# EAGLE board 0869924b8491299c740fd2650cca9fc03f659eed (EAGLE 6.6.0)
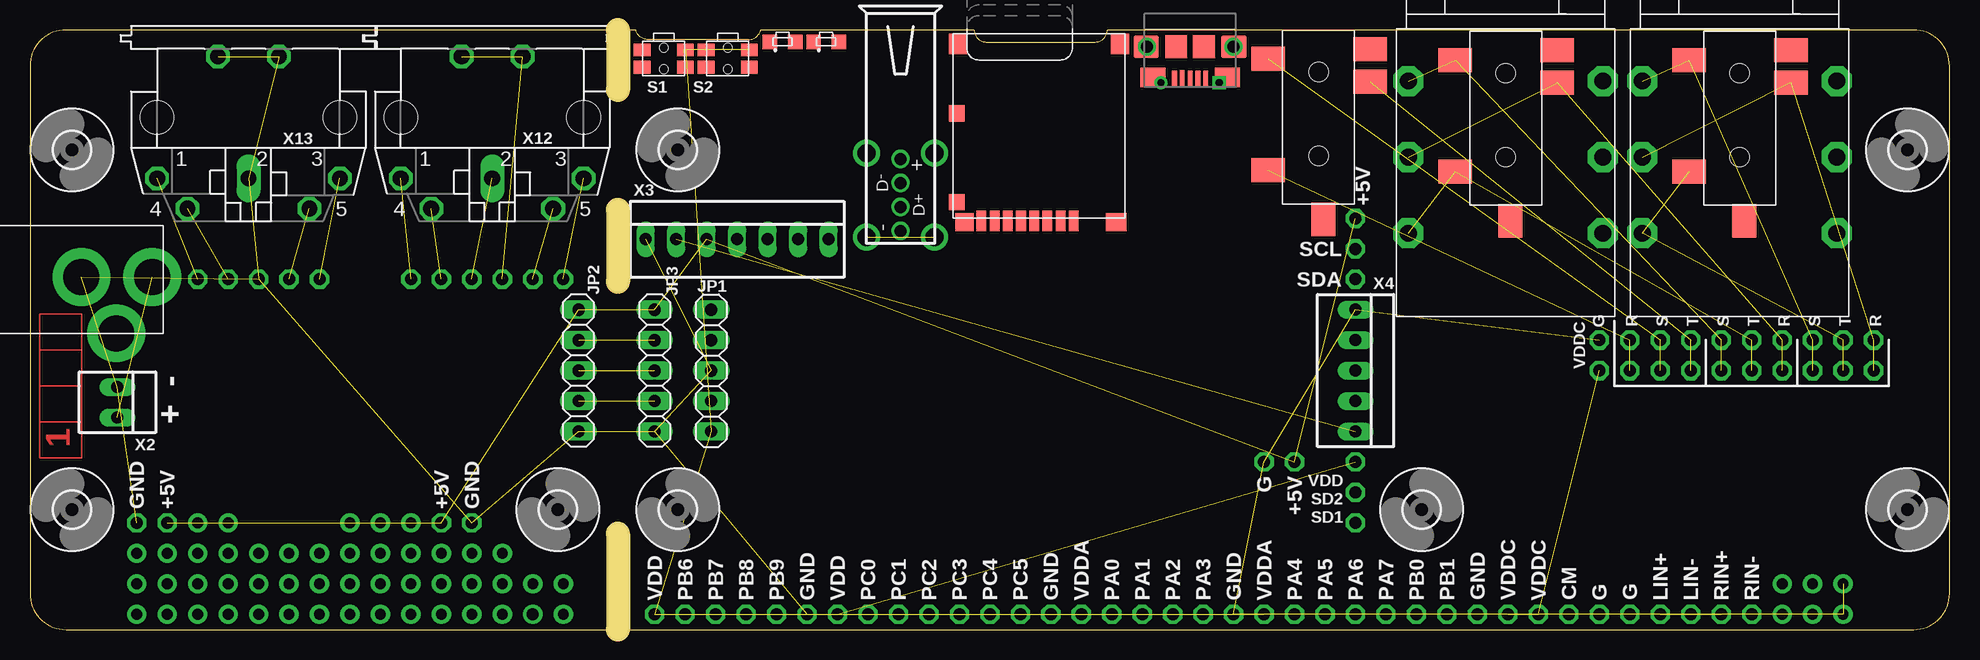
[diagram p0: board, top side]
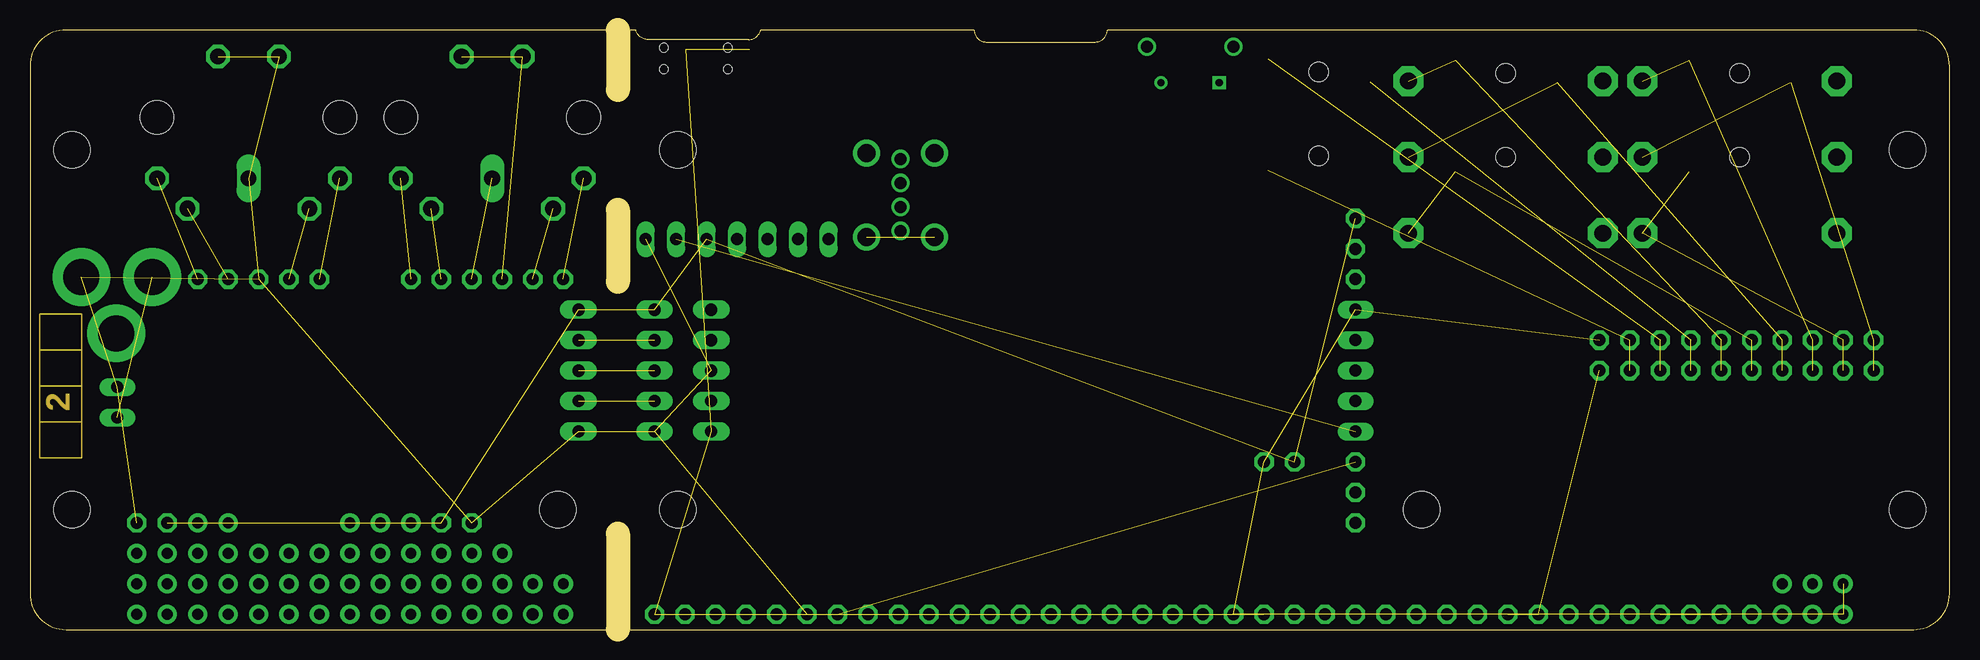
[diagram p1: board, inner layer Route2]
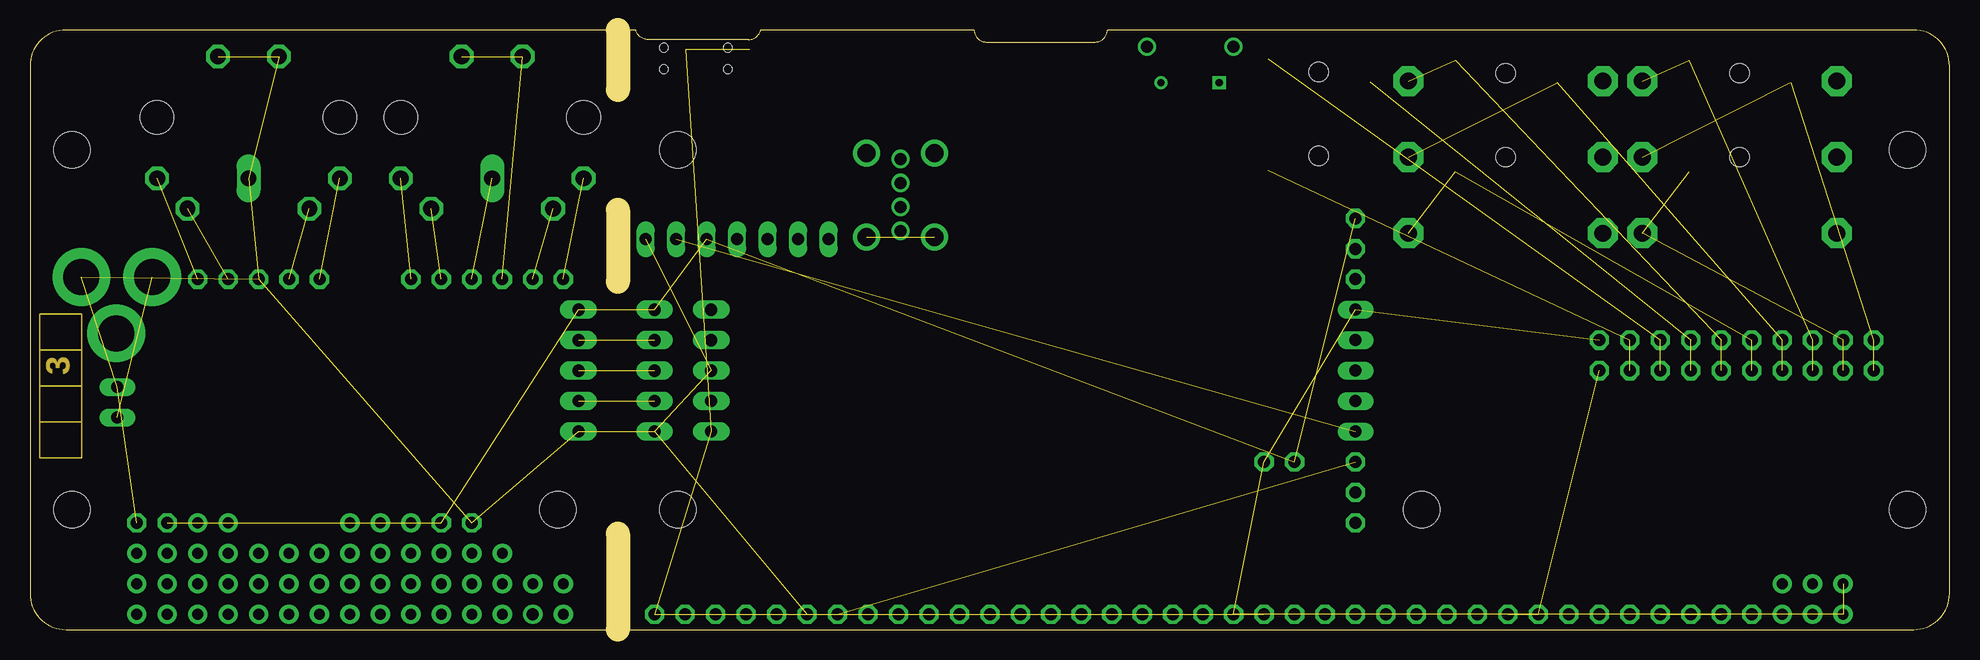
[diagram p2: board, inner layer Route3]
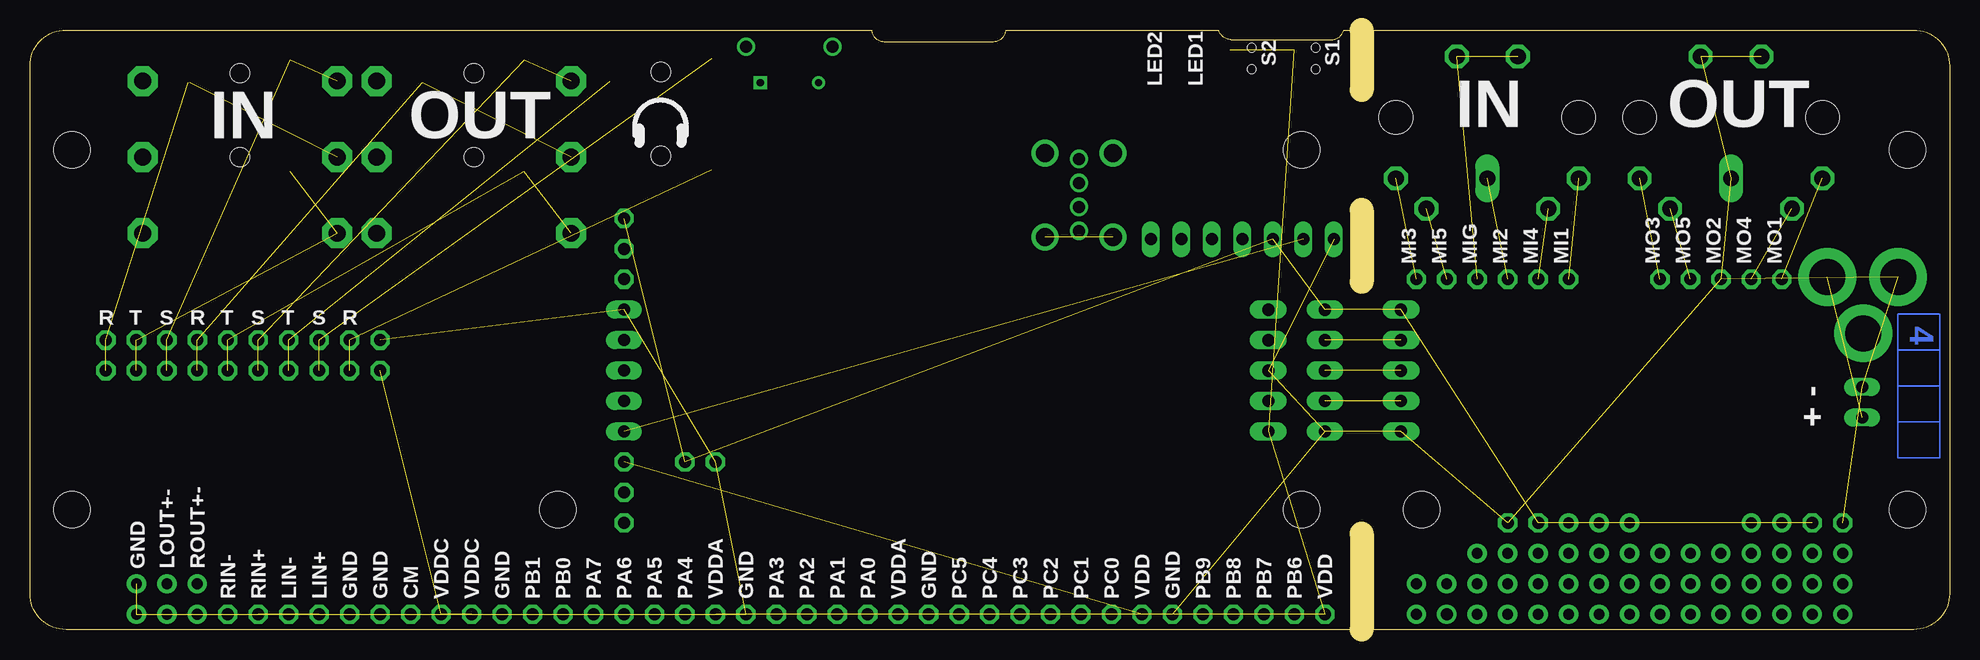
[diagram p3: board, bottom side, seen from below]

Size 160 x 50 mm. Coordinates in mm from the lower left corner, seen from the top.
Outline: 3,0 157,0 arc90 160,3 160,47 arc90 157,50 89.8,50 arc-90 88.8,49 79.7,49 arc-90 78.7,50 60.9,50 arc-79 59.9,49.2 51.5,49.2 arc-79 50.5,50 3,50 arc90 0,47 0,3 arc90 3,0
Copper layers (1*16): Top 0.035mm / dielectric 1.5mm / Bottom 0.035mm
Design rules "default": minimum track width 10mil, minimum drill 24mil, track to track 8mil, track to pad 8mil, pad to pad 8mil, via to via 8mil, smd to smd 8mil, copper to edge 40mil, drill to drill 8mil, minimum pad ring 10mil, minimum via ring 8mil, stop-mask expansion 4mil, vias tented up to drill 0mil, thermal gap 10mil
Milling: 3 lines

## Footprints (pad centres in the part's own frame; a part is rotated, then mirrored left to right if it is on the bottom)
SML-A12 = smd 1.2 x 1.2: A 1.05,0; K -1.05,0
3,0 = hole 3: 0,0
1X05 = drill 1.016 long: 1 -5.08,0; 2 -2.54,0; 3 0,0; 4 2.54,0; 5 5.08,0
EVQP7 = smd 1.4 x 1.05: P$1 -1.8,0.725; P$1@1 1.8,0.725; P$2 -1.8,-0.725; P$2@1 1.8,-0.725 | hole 0.7: 0,0.9; 0,-0.9
PROTOHOLE_NAMED = drill 1 pad 1.6 octagon: P$1 0,0
PROTOHOLE = drill 1 pad 1.6 octagon: P$1 0,0
USB_A_VERTICAL_PTH = drill 1: 1 3.45,12.75; 2 3.45,14.75; 3 3.45,16.75; 4 3.45,18.75 | drill 1.5: P$1 0.6,12.25; P$2 6.3,12.25; P$3 6.3,19.25; P$4 0.6,19.25
PJ-102A = drill 3 pad 4.8: RING 0.1,-3.39; RING_SW -4.6,-6.29; TIP 0.1,-9.29
22-23-2021 = drill 1 long: 1 -1.27,0; 2 1.27,0
22-23-2071 = drill 1 long: 1 -7.62,0; 2 -5.08,0; 3 -2.54,0; 4 0,0; 5 2.54,0; 6 5.08,0; 7 7.62,0
22-23-2051 = drill 1 long: 1 -5.08,0; 2 -2.54,0; 3 0,0; 4 2.54,0; 5 5.08,0
35RASMT4BHNTR = smd 2 x 2.8: P1 2.4,-4.2; P2 4.3,4.3; P3 11.7,-4.2; P4 1.6,4.3 | smd 2.8 x 2: P5 15.8,0.4 | hole 1.6: 3.5,0; 10.5,0
JACK63 = drill 1.4 pad 2.5 octagon: R -10.7,8.115; RN -10.7,-8.115; S -4.35,8.115; SN -4.35,-8.115; T -17.05,8.115; TN -17.05,-8.115
ZX62D-B-5P8 = smd 0.4 x 1.35: P$1 -1.3,2.675; P$2 -0.65,2.675; P$3 0,2.675; P$4 0.65,2.675; P$5 1.3,2.675 | smd 1.8 x 1.9: P$6 -1.15,0; P$7 1.15,0 | drill 0.6 pad 1 square: SH1 -2.425,3 | smd 2.1 x 1.6: SH1P -3.1,2.55; SH2P 3.1,2.55 | drill 0.6 pad 1: SH2 2.425,3 | drill 1 pad 1.5: SH3 -3.6,0; SH4 3.6,0 | smd 2.1 x 1.9: SH3P -3.65,0; SH4P 3.65,0
MOLEX_502774 = smd 0.8 x 1.68: 1 -2.9,15.61; 2 -1.8,15.61; 3 -0.7,15.61; 4 0.4,15.61; 5 1.5,15.61; 6 2.6,15.61; 7 3.7,15.61; 8 4.8,15.61 | smd 1.7 x 1.5: 10 -6.45,15.7 | smd 1.5 x 1.7: 11 6.75,0.85; 12 -6.75,0.85 | smd 1.5 x 1.5: 15 6.2,15.7 | smd 1.29 x 1.3: CD1 6.855,14.05 | smd 1.29 x 1.4: CD2 6.855,6.65
MAB5SH = drill 1.321 octagon: 1 7.62,5.08; 3 -7.62,5.08; 4 5.08,7.62; 5 -5.08,7.62; PE -2.54,-5.08; PE@ 2.54,-5.08 | drill 1.321 long: 2 0,5.08 | hole 2.794: 7.62,0; -7.62,0

## Placement (x,y rotation side)
D5  SML-A12 RED  [SML-A12]  62.73,49.02 0 top
D6  SML-A12 GREEN  [SML-A12]  66.36,49.02 0 top
H1  MOUNT-HOLE3.0  [3,0]  3.5,10 90 top
H2  MOUNT-HOLE3.0  [3,0]  3.5,40 90 top
H3  MOUNT-HOLE3.0  [3,0]  54,40 90 top
H4  MOUNT-HOLE3.0  [3,0]  156.5,10 90 top
H5  MOUNT-HOLE3.0  [3,0]  54,10 0 top
H6  MOUNT-HOLE3.0  [3,0]  156.5,40 0 top
H7  MOUNT-HOLE3.0  [3,0]  44,10 0 top
H8  MOUNT-HOLE3.0  [3,0]  116,10 0 top
JP1  [1X05]  56.78,21.59 90 top
JP2  NC  [1X05]  45.72,21.59 270 top
JP3  NC  [1X05]  52.07,21.59 270 top
S1  EVQP7  [EVQP7]  52.83,47.62 180 top
S2  EVQP7  [EVQP7]  58.17,47.62 180 top
TP1  VDDC  [PROTOHOLE_NAMED]  123.19,1.27 270 top
TP2  MI3  [PROTOHOLE_NAMED]  44.45,29.21 90 bottom
TP3  MI5  [PROTOHOLE_NAMED]  41.91,29.21 90 bottom
TP4  CM  [PROTOHOLE_NAMED]  128.27,1.27 270 top
TP5  MI1  [PROTOHOLE_NAMED]  31.75,29.21 90 bottom
TP6  MI4  [PROTOHOLE_NAMED]  34.29,29.21 90 bottom
TP7  G  [PROTOHOLE_NAMED]  133.35,1.27 270 top
TP8  MI2  [PROTOHOLE_NAMED]  36.83,29.21 90 bottom
TP9  MIG  [PROTOHOLE_NAMED]  39.37,29.21 90 bottom
TP10  MO3  [PROTOHOLE_NAMED]  24.13,29.21 90 bottom
TP11  MO1  [PROTOHOLE_NAMED]  13.97,29.21 90 bottom
TP12  MO5  [PROTOHOLE_NAMED]  21.59,29.21 90 bottom
TP13  GND  [PROTOHOLE_NAMED]  120.65,1.27 270 top
TP14  SD1  [PROTOHOLE_NAMED]  110.49,8.89 180 top
TP15  SD2  [PROTOHOLE_NAMED]  110.49,11.43 180 top
TP16  VDD  [PROTOHOLE_NAMED]  110.49,13.97 180 top
TP17  SDA  [PROTOHOLE_NAMED]  110.49,29.21 180 top
TP18  SCL  [PROTOHOLE_NAMED]  110.49,31.75 180 top
TP19  [PROTOHOLE]  135.89,21.59 90 top
TP20  S  [PROTOHOLE_NAMED]  135.89,24.13 90 top
TP21  [PROTOHOLE]  133.35,21.59 90 top
TP22  R  [PROTOHOLE_NAMED]  133.35,24.13 90 top
TP23  [PROTOHOLE]  138.43,21.59 90 top
TP24  T  [PROTOHOLE_NAMED]  151.13,24.13 90 top
TP25  T  [PROTOHOLE_NAMED]  138.43,24.13 90 top
TP26  [PROTOHOLE]  151.13,21.59 90 top
TP27  R  [PROTOHOLE_NAMED]  153.67,24.13 90 top
TP28  [PROTOHOLE]  153.67,21.59 90 top
TP29  S  [PROTOHOLE_NAMED]  148.59,24.13 90 top
TP30  [PROTOHOLE]  148.59,21.59 90 top
TP31  T  [PROTOHOLE]  143.51,21.59 90 top
TP32  T  [PROTOHOLE_NAMED]  143.51,24.13 90 top
TP33  R  [PROTOHOLE]  146.05,21.59 90 top
TP34  R  [PROTOHOLE_NAMED]  146.05,24.13 90 top
TP35  S  [PROTOHOLE]  140.97,21.59 90 top
TP36  S  [PROTOHOLE_NAMED]  140.97,24.13 90 top
TP37  PA0  [PROTOHOLE_NAMED]  90.17,1.27 90 top
TP38  PA1  [PROTOHOLE_NAMED]  92.71,1.27 90 top
TP39  PA2  [PROTOHOLE_NAMED]  95.25,1.27 90 top
TP40  PA3  [PROTOHOLE_NAMED]  97.79,1.27 90 top
TP41  PA4  [PROTOHOLE_NAMED]  105.41,1.27 90 top
TP42  PA5  [PROTOHOLE_NAMED]  107.95,1.27 90 top
TP43  PA6  [PROTOHOLE_NAMED]  110.49,1.27 90 top
TP44  PA7  [PROTOHOLE_NAMED]  113.03,1.27 90 top
TP45  PB0  [PROTOHOLE_NAMED]  115.57,1.27 90 top
TP46  PB1  [PROTOHOLE_NAMED]  118.11,1.27 90 top
TP47  PB6  [PROTOHOLE_NAMED]  54.61,1.27 90 top
TP48  PB7  [PROTOHOLE_NAMED]  57.15,1.27 90 top
TP49  PB8  [PROTOHOLE_NAMED]  59.69,1.27 90 top
TP50  PB9  [PROTOHOLE_NAMED]  62.23,1.27 90 top
TP51  PC0  [PROTOHOLE_NAMED]  69.85,1.27 90 top
TP52  PC1  [PROTOHOLE_NAMED]  72.39,1.27 90 top
TP53  PC2  [PROTOHOLE_NAMED]  74.93,1.27 90 top
TP54  PC3  [PROTOHOLE_NAMED]  77.47,1.27 90 top
TP55  PC4  [PROTOHOLE_NAMED]  80.01,1.27 90 top
TP56  PC5  [PROTOHOLE_NAMED]  82.55,1.27 90 top
TP57  GND  [PROTOHOLE_NAMED]  8.89,8.89 90 top
TP58  GND  [PROTOHOLE_NAMED]  36.83,8.89 90 top
TP59  G  [PROTOHOLE_NAMED]  130.81,1.27 90 top
TP60  GND  [PROTOHOLE_NAMED]  85.09,1.27 90 top
TP61  GND  [PROTOHOLE_NAMED]  64.77,1.27 90 top
TP62  GND  [PROTOHOLE_NAMED]  100.33,1.27 90 top
TP63  G  [PROTOHOLE_NAMED]  130.81,24.13 180 top
TP64  VDD  [PROTOHOLE_NAMED]  67.31,1.27 90 top
TP65  VDD  [PROTOHOLE_NAMED]  52.07,1.27 90 top
TP66  VDDC  [PROTOHOLE_NAMED]  125.73,1.27 90 top
TP67  G  [PROTOHOLE_NAMED]  102.87,13.97 270 top
TP68  +5V  [PROTOHOLE_NAMED]  34.29,8.89 90 top
TP69  +5V  [PROTOHOLE_NAMED]  11.43,8.89 90 top
TP70  +5V  [PROTOHOLE_NAMED]  110.49,34.29 180 top
TP71  VDDA  [PROTOHOLE_NAMED]  87.63,1.27 90 top
TP72  VDDA  [PROTOHOLE_NAMED]  102.87,1.27 90 top
TP73  MO4  [PROTOHOLE_NAMED]  16.51,29.21 90 bottom
TP74  MO2  [PROTOHOLE_NAMED]  19.05,29.21 90 bottom
TP75  LIN+  [PROTOHOLE_NAMED]  135.89,1.27 90 top
TP76  +5V  [PROTOHOLE_NAMED]  105.41,13.97 270 top
TP77  VDDC  [PROTOHOLE_NAMED]  130.81,21.59 180 top
TP78  LIN-  [PROTOHOLE_NAMED]  138.43,1.27 90 top
TP79  RIN+  [PROTOHOLE_NAMED]  140.97,1.27 90 top
TP80  RIN-  [PROTOHOLE_NAMED]  143.51,1.27 90 top
USB1  FCI 73725-0110BLF  [USB_A_VERTICAL_PTH]  76.02,52 180 top
X1  2.1MMJACKTHM  [PJ-102A]  0.9,29.3 90 top
X2  22-23-2021  [22-23-2021]  7.29,18.94 270 top
X3  22-23-2071  [22-23-2071]  58.95,32.55 0 top
X4  NC (22-23-2051)  [22-23-2051]  110.49,21.59 270 top
X5  NC (35RASMT4)  [35RASMT4BHNTR]  142.5,49.9 270 top
X6  NMJ6HFD2  [JACK63]  142.5,50.1 90 top
X7  NMJ6HFD2  [JACK63]  123,50.1 90 top
X8  NC (35RASMT4)  [35RASMT4BHNTR]  123,49.9 270 top
X9  35RASMT4  [35RASMT4BHNTR]  107.4,50 270 top
X10  ZX62D-B-5P8  [ZX62D-B-5P8]  96.7,48.6 180 top
X11  MOLEX_502774  [MOLEX_502774]  84.1,49.7 180 top
X12  MAB5SH  [MAB5SH]  38.53,42.71 180 top
X13  MAB5SH  [MAB5SH]  18.21,42.71 180 top

## Library data of the parts
D5 = led-sml-a12; DIGIKEY: 160-1479-6-ND; PAGE: TJ-0009?; PAGE_NOTE: SAME FOOTPRINT AS TJ-0000
D6 = led-sml-a12; DIGIKEY: 160-1478-6-ND; PAGE: TJ-0000
H1-H8 = holes
JP1-JP3 = pinhead
S1 S2 = switch_evqp7; DIGIKEY: CKN10514TR-ND; PAGE: TJ-0003
TP1-TP80 = axohw
USB1 = OLIMEX_CONNECTORS; PAGE: TH
X1 = adafruit; FARNELL: 1737246???; PAGE: TH
X2 = con-molex; MF: MOLEX; MPN: 22-23-2021; OC_FARNELL: 1462926; OC_NEWARK: 25C3832
X3 = con-molex; MF: MOLEX; MPN: 22-23-2071; OC_FARNELL: 1654534; OC_NEWARK: 56H0445
X4 = con-molex; MF: MOLEX; MPN: 22-23-2051; OC_FARNELL: 1462952; OC_NEWARK: 38C9178
X5 X8 = switchcraft_smdminijackf; PAGE: NC
X6 X7 = con-jack63; PAGE: TH
X9 = switchcraft_smdminijackf; PAGE: TJ-0006
X10 = j_usb_hirose_zx62d-b-5p8; PAGE: TJ-0007
X11 = axohw; PAGE: TJ-0008
X12 X13 = con-hirschmann; DIGIKEY: CP-2350-ND; OC_FARNELL: 809883; OC_NEWARK: unknown; PAGE: TH

## Nets
!RST: JP1.5
+5V: JP2.1 JP3.1 TP68.P$1 TP69.P$1 TP70.P$1 TP76.P$1 X3.3
BLINN: TP24.P$1 TP26.P$1 X5.P3 X6.T
BLOUTP: TP31.P$1 TP32.P$1 X7.T X8.P3
BOOT0: S1.P$1
BRINN: TP27.P$1 TP28.P$1 X5.P2 X6.R
BROUTP: TP33.P$1 TP34.P$1 X7.R X8.P2
CM: TP4.P$1
GND: JP1.3 JP2.5 JP3.5 TP7.P$1 TP13.P$1 TP57.P$1 TP58.P$1 TP59.P$1 TP60.P$1 TP61.P$1 TP62.P$1 TP63.P$1 TP67.P$1 TP74.P$1 X1.RING X2.1 X3.1 X4.1 X13.2 X13.PE X13.PE@
HP_DUMMY1: X9.P5
HP_DUMMY2: X9.P4
HSHIELD: USB1.P$3 USB1.P$4
INSGND: TP29.P$1 TP30.P$1 X5.P1 X6.S
LHP: TP21.P$1 TP22.P$1 X9.P3
LIN+: TP75.P$1 TP79.P$1
LIN-: TP78.P$1
MI1: TP5.P$1 X12.1
MI2: TP8.P$1 X12.2
MI3: TP2.P$1 X12.3
MIDIIN4: TP6.P$1 X12.4
MIDIIN5: TP3.P$1 X12.5
MIDIOUT4: TP73.P$1 X13.4
MIDIOUT5: TP12.P$1 X13.5
MIG: TP9.P$1 X12.PE X12.PE@
MO1: TP11.P$1 X13.1
MO3: TP10.P$1 X13.3
MONOOUT: TP19.P$1 TP20.P$1 X9.P1
OUTSGND: TP35.P$1 TP36.P$1 X7.S X8.P1
PA0_GP: TP37.P$1
PA1_GP: TP38.P$1
PA2_GP: TP39.P$1
PA3_GP: TP40.P$1
PA4_GP: TP41.P$1
PA5_GP: TP42.P$1
PA6_GP: TP43.P$1
PA7_GP: TP44.P$1
PA8_MCO1: X4.2
PA13_SYS_JTMS_SWDIO: JP1.4
PA14_SYS_JTMS_SWCLK: JP1.2
PA15_SPI3NSS: X3.6
PB0_GP: TP45.P$1
PB1_GP: TP46.P$1
PB3_SPI3SCK: X3.5
PB4_SPI3MISO: X3.7
PB6_GP: TP47.P$1
PB7_GP: TP48.P$1
PB8_GP: TP49.P$1
PB9_GP: TP50.P$1
PB10_USART3TX: X3.2 X4.5
PC0_GP: TP51.P$1
PC1_GP: TP52.P$1
PC2_GP: TP53.P$1
PC3_GP: TP54.P$1
PC4_GP: TP55.P$1
PC5_GP: TP56.P$1
PD6_SPI3MOSI: X3.4
PE3_SAI1_SD_B: TP15.P$1
PE4_SAI1_FS_A: X4.4
PE5_SAI1_SCK_A: X4.3
PE6_SAI1_SD_A: TP14.P$1
PG6L: D6.A
PG9_USART6RX: JP2.3 JP3.3
PG14_USART6TX: JP2.4 JP3.4
PH7_I2C3SCL: TP18.P$1
PH8_I2C3SDA: TP17.P$1
RHP: TP23.P$1 TP25.P$1 X9.P2
RIN-: TP80.P$1
VBUSEND: JP2.2 JP3.2
VDD: JP1.1 S1.P$2 S2.P$2 TP16.P$1 TP64.P$1 TP65.P$1
VDDA1: TP71.P$1 TP72.P$1
VDDC: TP1.P$1 TP66.P$1 TP77.P$1
VINJACK1: X1.TIP X2.2

## Tracks (layer width: path | path; a pad name or v marks a point on that pad's centre or on a via)
+5V  (6 unrouted)
BLINN  (3 unrouted)
BLOUTP  (3 unrouted)
BRINN  (3 unrouted)
  Top 1: X5.P2 146.7,45.6
BROUTP  (3 unrouted)
GND  (via drill 0.9 pad 1.6)  (22 unrouted)
  other vias: 151.13,3.81 151.13,1.27
HSHIELD  (1 unrouted)
INSGND  (3 unrouted)
LHP  (2 unrouted)
LIN+  (1 unrouted)
LOUTN  (via drill 0.9 pad 1.6)
  other vias: 148.59,3.81
LOUTP  (via drill 0.9 pad 1.6)
  other vias: 148.59,1.27
MI1  (1 unrouted)
MI2  (1 unrouted)
MI3  (1 unrouted)
MIDIIN4  (1 unrouted)
MIDIIN5  (1 unrouted)
MIDIOUT4  (1 unrouted)
MIDIOUT5  (1 unrouted)
MIG  (2 unrouted)
MO1  (1 unrouted)
MO3  (1 unrouted)
MONOOUT  (2 unrouted)
N$1  (via drill 1 pad 1.6)
  other vias: 41.91,1.27
N$12
  Top 0.125: 0.8,23.3 0.8,26.3 4.3,26.3 4.3,23.3 | 0.8,23.3 0.8,20.3 | 0.8,20.3 0.8,17.3 | 0.8,17.3 0.8,14.3 4.3,14.3 4.3,17.3 | 4.3,17.3 4.3,20.3 | 4.3,20.3 4.3,23.3 | 0.8,17.3 4.3,17.3 | 0.8,20.3 4.3,20.3 | 0.8,23.3 4.3,23.3
N$15
  Route2 0.125: 0.8,23.3 0.8,26.3 4.3,26.3 4.3,23.3 | 0.8,23.3 0.8,20.3 | 0.8,20.3 0.8,17.3 | 0.8,17.3 0.8,14.3 4.3,14.3 4.3,17.3 | 4.3,17.3 4.3,20.3 | 4.3,20.3 4.3,23.3 | 0.8,23.3 4.3,23.3 | 0.8,20.3 4.3,20.3 | 0.8,17.3 4.3,17.3
N$16
  Route3 0.125: 0.8,23.3 0.8,26.3 4.3,26.3 4.3,23.3 | 0.8,23.3 0.8,20.3 | 0.8,20.3 0.8,17.3 | 0.8,17.3 0.8,14.3 4.3,14.3 4.3,17.3 | 4.3,17.3 4.3,20.3 | 4.3,20.3 4.3,23.3 | 0.8,23.3 4.3,23.3 | 0.8,20.3 4.3,20.3 | 0.8,17.3 4.3,17.3
N$18
  Bottom 0.125: 0.8,23.3 0.8,26.3 4.3,26.3 4.3,23.3 | 0.8,23.3 0.8,20.3 | 0.8,20.3 0.8,17.3 | 0.8,17.3 0.8,14.3 4.3,14.3 4.3,17.3 | 4.3,17.3 4.3,20.3 | 4.3,20.3 4.3,23.3 | 0.8,23.3 4.3,23.3 | 0.8,20.3 4.3,20.3 | 0.8,17.3 4.3,17.3
N$20  (via drill 0.9 pad 1.6)
  other vias: 44.45,1.27
N$22  (via drill 0.9 pad 1.6)
  other vias: 39.37,1.27
N$23  (via drill 0.9 pad 1.6)
  other vias: 36.83,1.27
N$24  (via drill 0.9 pad 1.6)
  other vias: 34.29,1.27
N$25  (via drill 0.9 pad 1.6)
  other vias: 31.75,1.27
N$27  (via drill 0.9 pad 1.6)
  other vias: 29.21,1.27
N$28  (via drill 0.9 pad 1.6)
  other vias: 26.67,1.27
N$29  (via drill 0.9 pad 1.6)
  other vias: 24.13,1.27
N$30  (via drill 0.9 pad 1.6)
  other vias: 21.59,1.27
N$31  (via drill 0.9 pad 1.6)
  other vias: 19.05,1.27
N$32  (via drill 0.9 pad 1.6)
  other vias: 16.51,1.27
N$33  (via drill 0.9 pad 1.6)
  other vias: 13.97,1.27
N$34  (via drill 0.9 pad 1.6)
  other vias: 11.43,1.27
N$35  (via drill 0.9 pad 1.6)
  other vias: 8.89,1.27
N$36  (via drill 0.9 pad 1.6)
  other vias: 8.89,3.81
N$37  (via drill 0.9 pad 1.6)
  other vias: 11.43,3.81
N$38  (via drill 0.9 pad 1.6)
  other vias: 26.67,8.89
N$42  (via drill 0.9 pad 1.6)
  other vias: 16.51,8.89
N$43  (via drill 0.9 pad 1.6)
  other vias: 13.97,8.89
N$44  (via drill 0.9 pad 1.6)
  other vias: 31.75,8.89
N$45  (via drill 0.9 pad 1.6)
  other vias: 29.21,8.89
N$48  (via drill 0.9 pad 1.6)
  other vias: 13.97,3.81
N$51  (via drill 0.9 pad 1.6)
  other vias: 16.51,3.81
N$52  (via drill 0.9 pad 1.6)
  other vias: 19.05,3.81
N$54  (via drill 0.9 pad 1.6)
  other vias: 21.59,3.81
N$55  (via drill 0.9 pad 1.6)
  other vias: 24.13,3.81
N$56  (via drill 0.9 pad 1.6)
  other vias: 26.67,3.81
N$57  (via drill 0.9 pad 1.6)
  other vias: 29.21,3.81
N$58  (via drill 0.9 pad 1.6)
  other vias: 31.75,3.81
N$59  (via drill 0.9 pad 1.6)
  other vias: 34.29,3.81
N$60  (via drill 0.9 pad 1.6)
  other vias: 36.83,3.81
N$63  (via drill 0.9 pad 1.6)
  other vias: 39.37,3.81
N$64  (via drill 0.9 pad 1.6)
  other vias: 41.91,3.81
N$65  (via drill 0.9 pad 1.6)
  other vias: 44.45,3.81
N$67  (via drill 0.9 pad 1.6)
  other vias: 39.37,6.35
N$69  (via drill 0.9 pad 1.6)
  other vias: 36.83,6.35
N$70  (via drill 0.9 pad 1.6)
  other vias: 34.29,6.35
N$71  (via drill 0.9 pad 1.6)
  other vias: 31.75,6.35
N$72  (via drill 0.9 pad 1.6)
  other vias: 29.21,6.35
N$74  (via drill 0.9 pad 1.6)
  other vias: 26.67,6.35
N$75  (via drill 0.9 pad 1.6)
  other vias: 24.13,6.35
N$76  (via drill 0.9 pad 1.6)
  other vias: 21.59,6.35
N$77  (via drill 0.9 pad 1.6)
  other vias: 19.05,6.35
N$78  (via drill 0.9 pad 1.6)
  other vias: 16.51,6.35
N$80  (via drill 0.9 pad 1.6)
  other vias: 13.97,6.35
N$81  (via drill 0.9 pad 1.6)
  other vias: 11.43,6.35
N$82  (via drill 0.9 pad 1.6)
  other vias: 8.89,6.35
OUTSGND  (3 unrouted)
PB10_USART3TX  (1 unrouted)
PG9_USART6RX  (1 unrouted)
PG14_USART6TX  (1 unrouted)
RHP  (2 unrouted)
ROUTN  (via drill 0.9 pad 1.6)
  other vias: 146.05,3.81
ROUTP  (via drill 0.9 pad 1.6)
  other vias: 146.05,1.27
VBUSEND  (1 unrouted)
VDD  (5 unrouted)
VDDA1  (1 unrouted)
  Top 0.125: TP72.P$1 102.83,1.27
VDDC  (2 unrouted)
VINJACK1  (1 unrouted)

## Text on the board
Top: 1
Route2: 2
Route3: 3
Bottom: 4
tNames: - | +
bNames: LED1 | LED2 | S1 | S2 | OUT | IN | OUT | IN | R | S | T | S | T | R | S | T | R | + | - | ROUT+- | LOUT+- | GND | VDD | PB6 | PB7 | PB8 | PB9 | GND | VDD | PC0 | PC1 | PC2 | PC3 | PC4 | PC5 | GND | VDDA | PA0 | PA1 | PA2 | PA3 | GND | VDDA | PA4 | PA5 | PA6 | PA7 | PB0 | PB1 | GND | VDDC | VDDC | CM | GND | GND | LIN+ | LIN- | RIN+ | RIN-
Document: v1.1 only!
tDocu: Axoloti Core / board outline / connector/pad locations